# Altium PCB PCB1.PcbDoc
Units mm, origin at the board's own origin, x right, y up, seen from the top; angles counter-clockwise.
Board outline 26.2 x 30 mm, 2 copper layers (Top Layer, Bottom Layer); 7 components, 10 nets, 30 pads, 6 vias.
Unrouted connection lines stored in the file: 7.
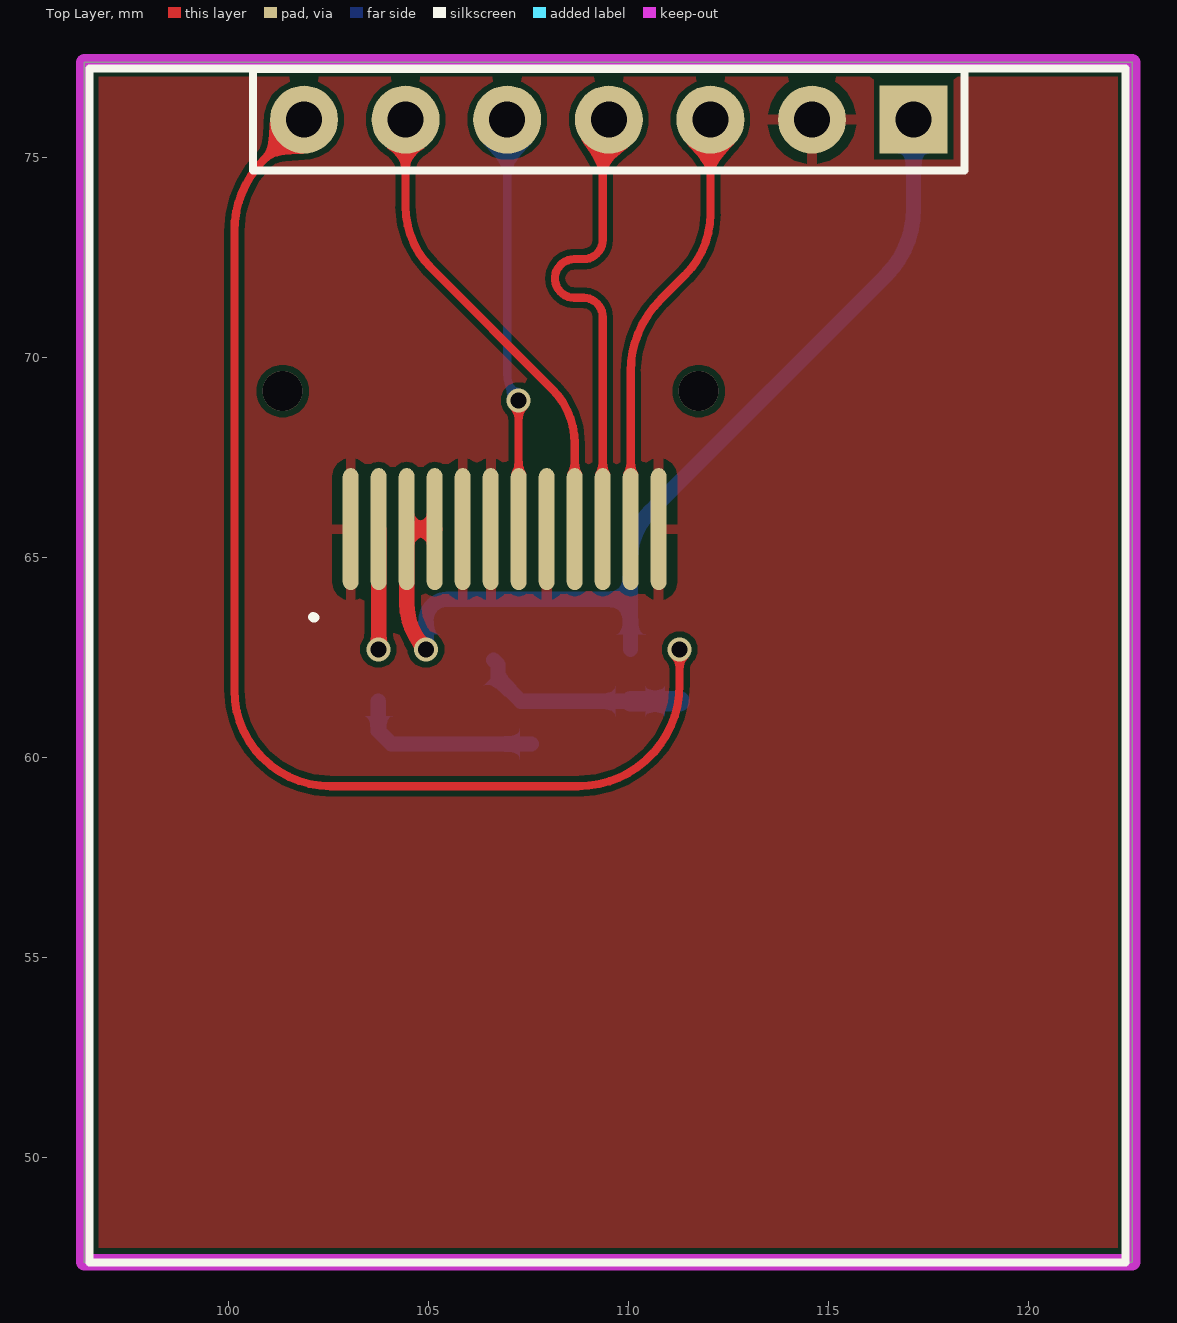
[diagram p0: Top Layer view]
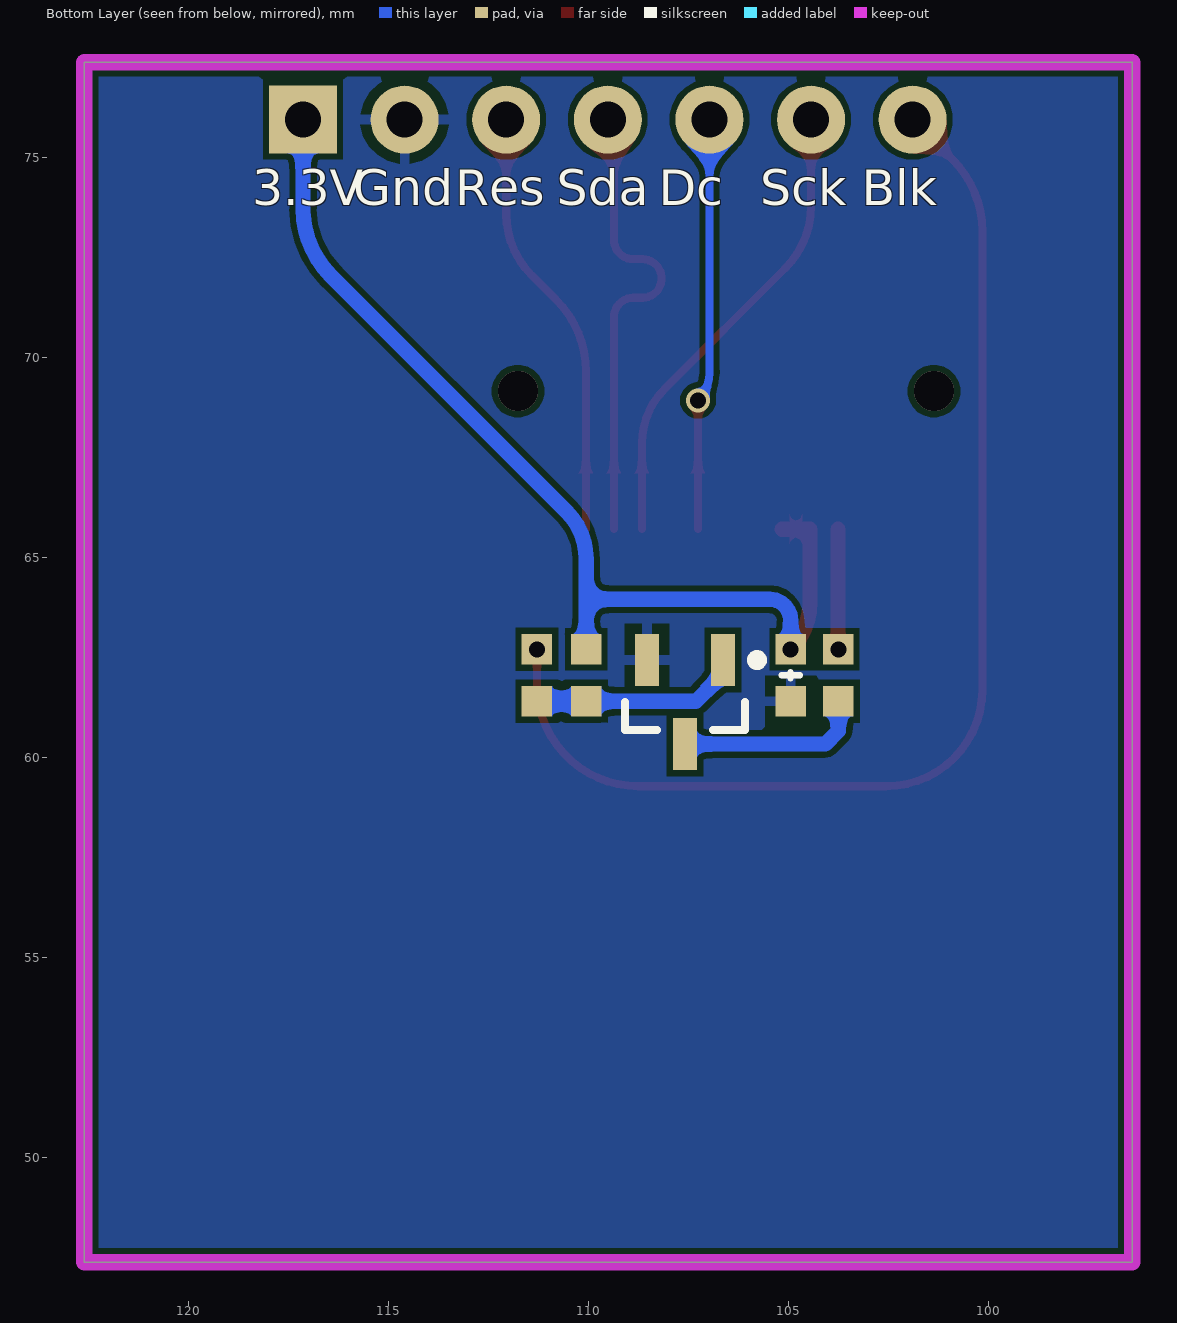
[diagram p1: Bottom Layer view, seen from below]

## Layer stack, top to bottom
Top Solder: solder mask 0.0102, Solder Resist, Dk 3.5
Top Layer: signal copper 0.0356
Dielectric 1: dielectric 0.32, FR-4, Dk 4.8
Bottom Layer: signal copper 0.0356
Bottom Solder: solder mask 0.0102, Solder Resist, Dk 3.5

## Board outline
96.393,47.371 122.593,47.371 122.593,77.371 96.393,77.371

## Design rules (kind name [scope] priority, off if disabled: settings)
Clearance [All] p1: gap=0.152 ignorepadtopadclearanceinfootprint=TRUE
PolygonConnect [All] p1: connectstyle=Relief reliefconductorwidth=0.254 reliefentries=4 polygonreliefangle="90 Angle" airgapwidth=0.254
RoutingVias [All] p1: holewidth=0.4 width=0.6 viastyle="Through Hole" minholewidth=0.4 minwidth=0.6 maxholewidth=0.711 maxwidth=1.27
SolderMaskExpansion [All] p1: expansion=0.102 istentingtop=FALSE
UnRoutedNet [All] p1: checkbadconnections=TRUE
Width [All] p1: maxlimit=0.508 minlimit=0.152 preferedwidth=0.279
29 further rules are at their usual default settings.

## Components (designator, comment, footprint, x,y, rotation, side; value= is the part's Value field where it differs from the comment)
C1 "104" "C 0603_L" 104.934,62.047 r270 bottom
JP1 "HDR-1X7" HDR2.54-M-LI-7P 109.505,75.939 r180 top
Q1 "SS8050" SOT23-3N 107.575,61.378 r270 bottom
R1 "10R" "R 0603_L" 103.744,62.047 r90 bottom
R2 "1K" "R 0603_L" 111.277,62.047 r270 bottom
R3 "10K" "R 0603_L" 110.046,62.047 r90 bottom
U1 "TFT-1.3" TFT-1.3 106.553,69.85 r90 top locked

## Footprints (in the part's own frame and the unit in brackets; to place one, negate y for a bottom-side part, rotate by r counter-clockwise, add the part's x,y. Pads: shape width x height; smd on the part's side, far side on the other; paste and mask are expansions set on the pad)
"C 0603_L" [mil] "无极性贴片电容                                       淘宝ID:黄晶宝石"
  rect 30x30 smd: 1(-25.59,0) 2(25.59,0)
  silkscreen extent -3,-9 3,9, body extent -31,-16 32,16, height 32
HDR2.54-M-LI-7P [mm] "排母，7脚"
  rect 1.7x1.7 hole 0.9: 1(-7.62,0)
  round 1.7 hole 0.9: 2(-5.08,0) 3(-2.54,0) 4(0,0) 5(2.54,0) 6(5.08,0) 7(7.62,0)
  silkscreen extent -8.89,-1.27 8.89,1.27, body extent -8.89,-1.27 8.89,1.27, height 8.5
"R 0603_L" [mil] "1/10W贴片电阻                 淘宝ID:黄晶宝石"
  rect 30x30 smd: 1(-25.59,0) 2(25.59,0)
  body extent -31,-16 31,16, height 16
SOT23-3N [mm] "SOT23, 3-Leads, Body 2.9x1.3mm, Pitch 0.95mm, Lead Span 2.4mm, IPC Medium Density封装库来自淘宝卖家 ID：黄晶宝石"
  rect 1.3x0.6 smd: 1(-1.05,0.95) 2(-1.05,-0.95) 3(1.05,0)
  silkscreen extent -1.17,-1.5 0.7,1.92, body extent -1.2,-1.5 1.2,1.5, height 1.05
TFT-1.3 [mm]
  oval 3.05x0.4 smd: 1(-4.15,3.5) 2(-4.15,2.8) 3(-4.15,2.1) 4(-4.15,1.4) 5(-4.15,0.7) 6(-4.15,0) 7(-4.15,-0.7) 8(-4.15,-1.4) 9(-4.15,-2.1) 10(-4.15,-2.8) 11(-4.15,-3.5) 12(-4.15,-4.2)
  silkscreen extent -22.48,-15.88 7.37,10.03, body extent -21.76,-15.85 7.46,9.95, height 1.5

## Part data
C1: library part C, "贴片电容", BOM名称=无极性贴片电容, 封装库来自淘宝卖家ID：黄晶宝石=其他店铺购入均为盗版假冒封装库, 联系卖家，免费查找封装=唯一出售店铺网址https://shop463601444.taobao.com
JP1: library part "Header 7", "7P接插件", BOM名称=7P接插件, 封装库来自淘宝卖家 ID：黄晶宝石=其他店铺购入均为盗版假冒封装库, 联系卖家，免费查找封装=唯一出售店铺网址https://shop463601444.taobao.com
Q1: library part 8050-SMD, "高频放大-NPN型", BOM名称=高频放大-NPN型, B属性="40V 1.5A 1W 100MHZ", 联系卖家，免费查找封装=唯一出售店铺网址https://shop463601444.taobao.com
R1 R2 R3: library part R, "贴片电阻", BOM名称=贴片电阻, 封装库来自淘宝卖家ID：黄晶宝石=其他店铺购入均为盗版假冒封装库, 联系卖家，免费查找封装=唯一出售店铺网址https://shop463601444.taobao.com

## Via types
v1: diameter 0.6, hole 0.4, Top Layer to Bottom Layer, tented both sides, 4 vias
v2: diameter 1, hole 1, Top Layer to Bottom Layer, 2 vias

## Nets (pads, with @x,y where several pads share a name; then routed paths per layer and width w, separated by ;. In a path a pad name is that pad's centre, name@x,y a point inside that pad or via, vN(x,y) a via of type N, cw(c..) or ccw(c..) an arc to the next point about the centre after c; other vN are vias at no path point)
3.3V: C1.1 JP1.1 R3.2 U1.3 U1.4 | length 26
  Top Layer w0.381: v1(104.934,62.697) cw(c106.096,63.858) 104.453,63.858 U1.3 U1.4
  Bottom Layer w0.381: v1(104.934,62.697) 104.934,63.416 cw(c105.466,63.416) 105.466,63.948 110.046,63.948 ; R3.2 110.046,63.948 ; JP1.1 117.125,73.713 cw(c114.751,73.713) 116.429,72.034 110.773,66.378 110.541,66.146 ccw(c111.732,64.953) 110.046,64.953 110.046,64.951 110.046,64.623 110.046,63.948
GND: C1.2 JP1.2 Q1.2 U1.1 U1.5 U1.6 U1.8 U1.12
NetQ1_1: Q1.1 R2.2 R3.1 | length 5.3
  Bottom Layer w0.381: Q1.1 106.734,62.319 106.734,61.968 107.306,61.397 R3.1
  Bottom Layer w0.508: R3.1 R2.2
NetQ1_3: Q1.3 R1.1 | length 4.7
  Bottom Layer w0.381: R1.1 103.744,60.653 104.068,60.329 107.574,60.329 Q1.3
NetR1_2: R1.2 U1.2 | length 3
  Top Layer w0.381: v1@103.753,62.706 U1.2
  other v1: 103.744,62.697
SPI2_MOSI: JP1.4 U1.10 | length 11.8
  Top Layer w0.203: U1.10 109.353,70.901 109.353,71.003 ccw(c108.87,71.003) 108.87,71.485 108.641,71.485 cw(c108.641,71.968) 108.641,72.45 108.87,72.45 ccw(c108.87,72.933) 109.353,72.933 109.353,73.781 109.353,75.572 cw(c109.872,75.572) JP1.4
SPI2_SCK: JP1.6 U1.9 | length 11.8
  Top Layer w0.203: JP1.6 104.425,74.693 104.425,73.777 ccw(c106.623,73.777) 105.069,72.222 108.088,69.203 ; 108.089,69.202 cw(c106.724,67.839) 108.653,67.839 U1.9
TFT_BLK: JP1.7 R2.1 | length 29.7
  Top Layer w0.203: JP1.7 100.887,74.941 ccw(c102.683,73.145) 100.143,73.145 100.143,61.682 ccw(c102.552,61.682) 102.552,59.273 108.737,59.273 ccw(c108.737,61.813) 111.277,61.813 v1(111.277,62.692)
TFT_DC: JP1.5 U1.7 | length 10.3
  Top Layer w0.203: v1(107.251,68.918) 107.251,65.703 U1.7
  Bottom Layer w0.203: JP1.5 106.965,69.609 ccw(c107.94,69.608) 107.249,68.92 v1(107.251,68.918)
TFT_RES: JP1.3 U1.11 | length 10.9
  Top Layer w0.203: U1.11 110.053,69.641 cw(c112.593,69.641) 110.797,71.437 111.412,72.052 ccw(c109.884,73.58) 112.045,73.58 JP1.3
copper on no net:
  other v2: 101.353,69.15 111.753,69.15

## Polygon pours and split planes (outlines as drawn)
GND on Bottom Layer "GND_L02_P001" (solid, pour order 1): 96.393,47.371 96.393,77.371 122.593,77.371 122.593,47.371
GND on Top Layer "GND_L01_P000" (solid, pour order 0): 96.393,47.371 96.393,77.371 122.593,77.371 122.593,47.371

## Keep-outs
Keep-Out Layer:
  the board outline again, w0.406

## Silkscreen, mask and mechanical layers (free items; w line width, h text height)
Bottom Overlay:
  text "Blk" at 103.158,73.499 h1.52
  text "Sck" at 105.699,73.499 h1.52
  text "Dc" at 108.233,73.499 h1.52
  text "Sda" at 110.783,73.499 h1.52
  text "Res" at 113.32,73.499 h1.52
  text "Gnd" at 115.865,73.499 h1.52
  text "3.3V" at 118.398,73.499 h1.52